# Altium PCB camera.PcbDoc
Units mil, origin at the board's own origin, x right, y up, seen from the top; angles counter-clockwise.
Board outline 1535 x 1315 mil, 2 copper layers (Top Layer, Bottom Layer); 3 components, 20 nets, 60 pads, 0 vias.
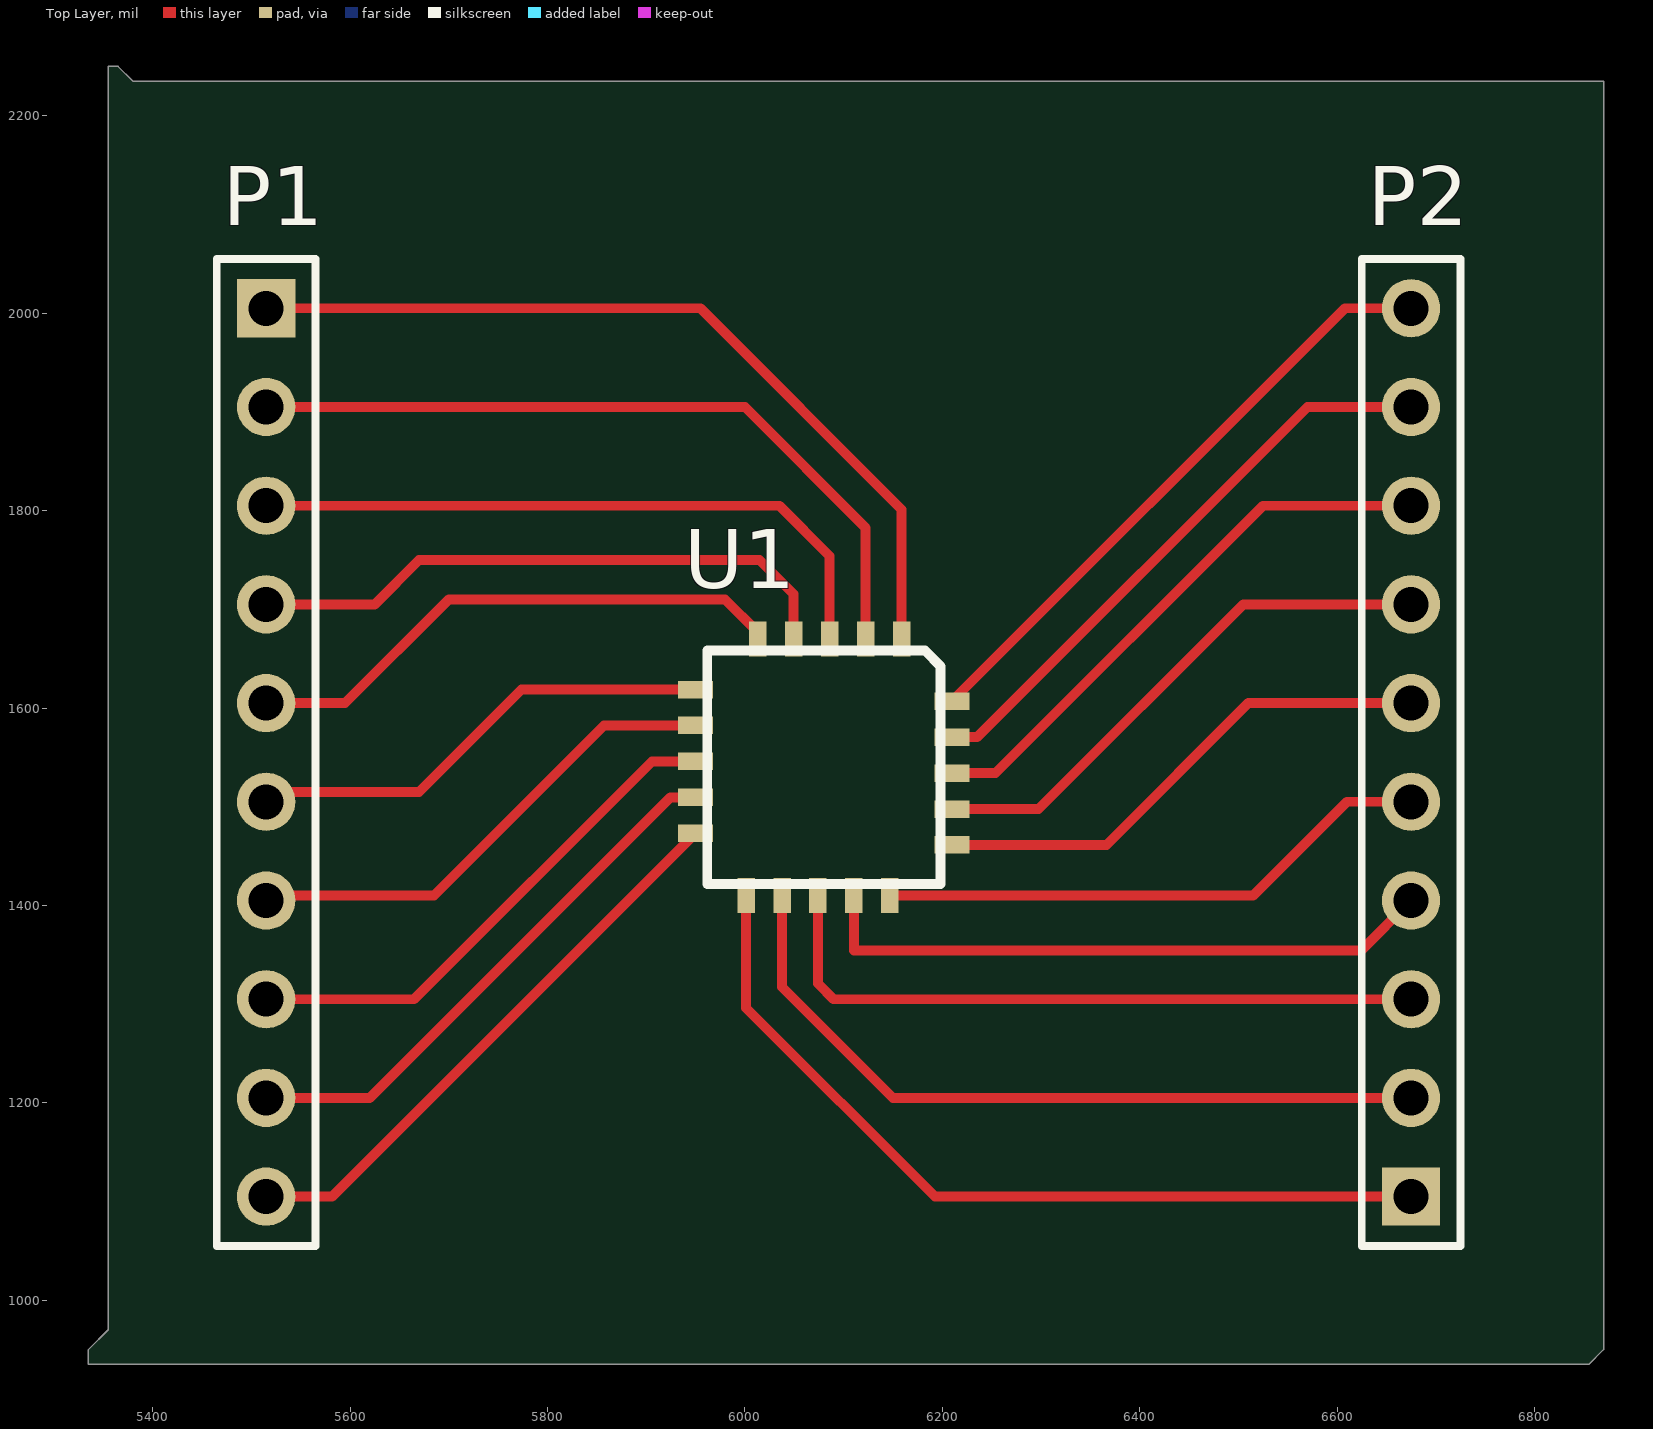
[diagram p0: Top Layer view]
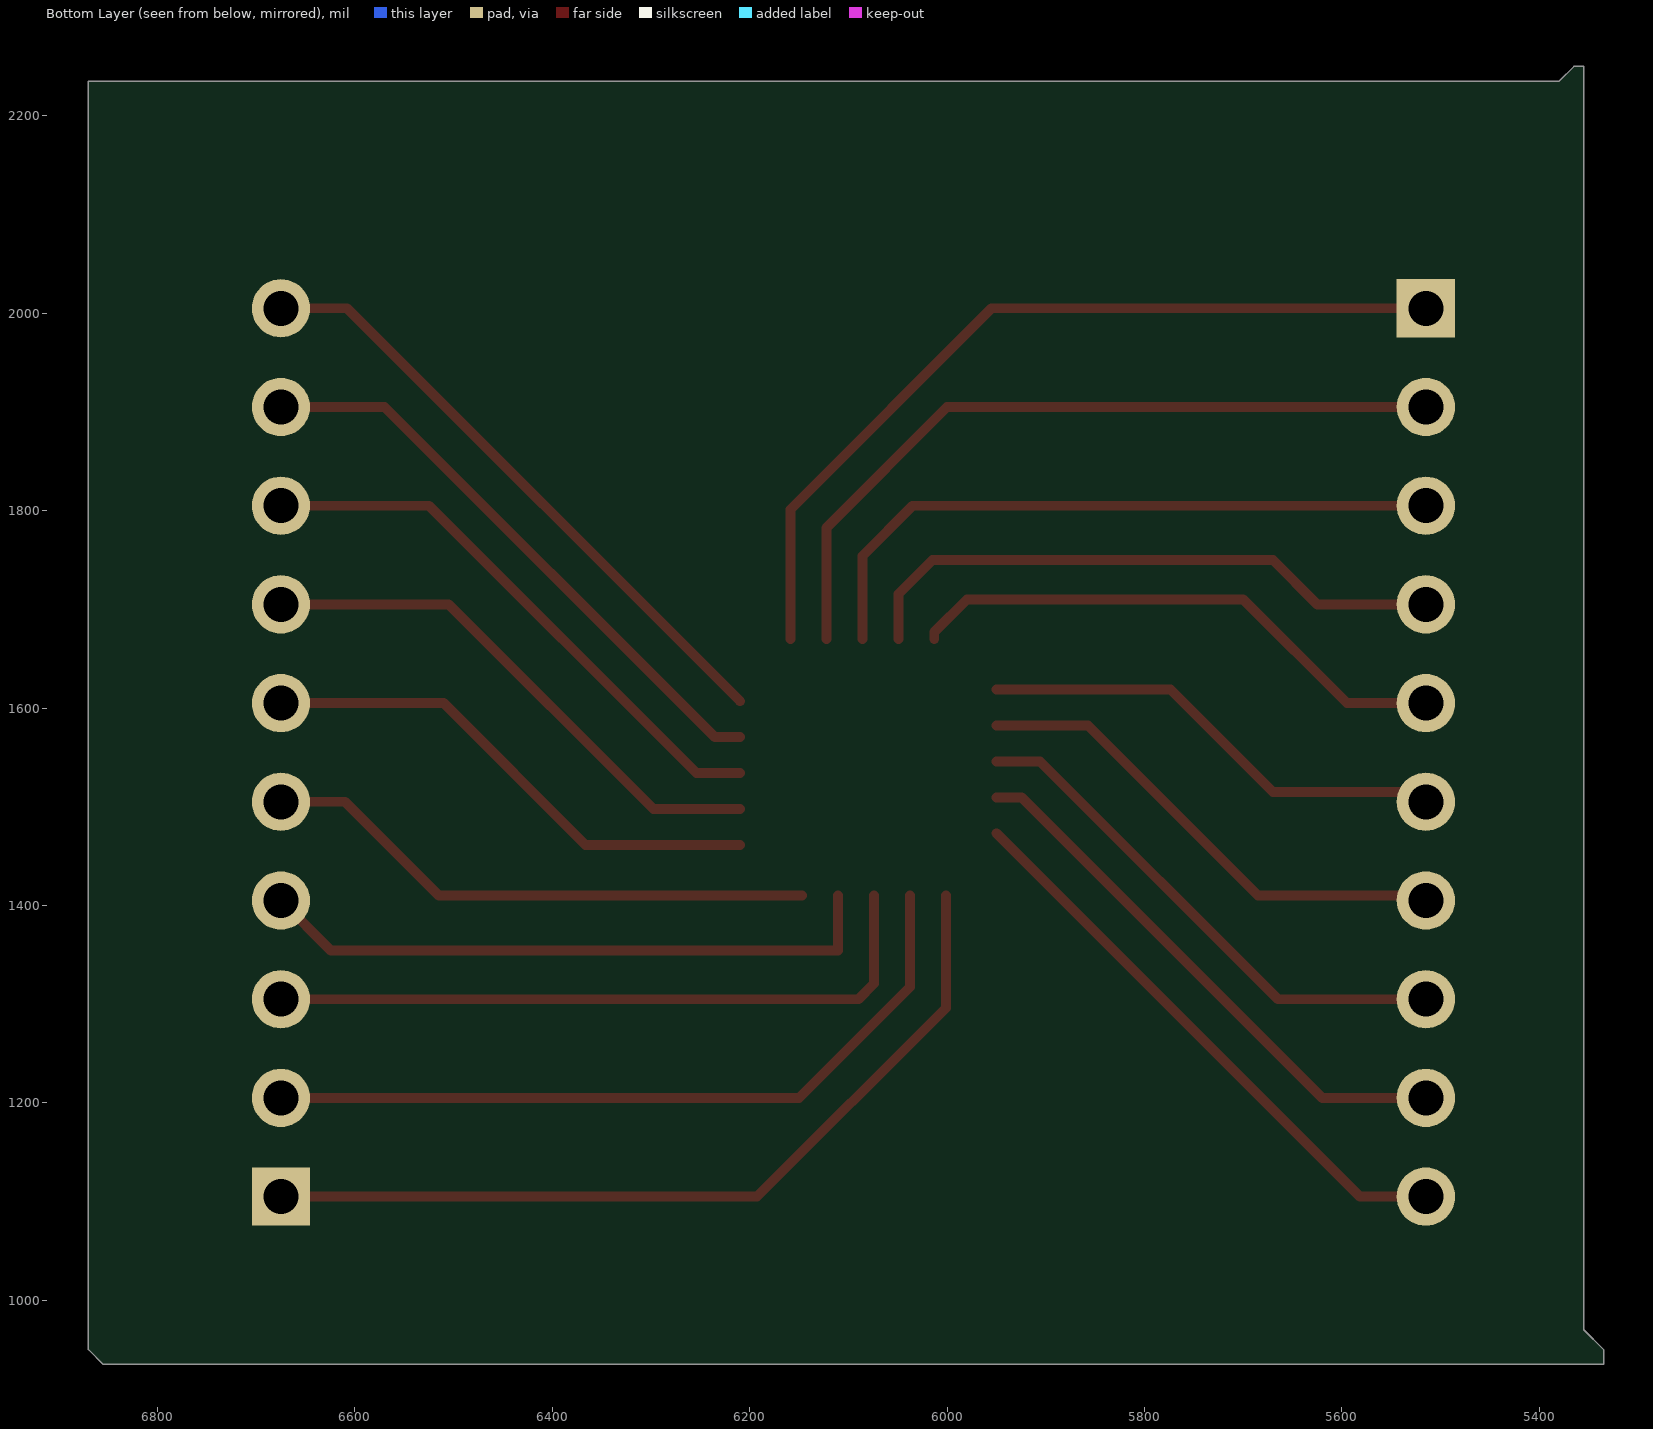
[diagram p1: Bottom Layer view, seen from below]

## Layer stack, top to bottom
Top Layer: signal copper 1.4
Dielectric: dielectric 12.6, FR-4, Dk 4.8
Bottom Layer: signal copper 1.4

## Board outline
5365,2250 5380,2235 6870,2235 6870,950 6855,935 5335,935 5335,950 5355,970 5355,2250

## Design rules (kind name [scope] priority, off if disabled: settings)
Clearance [All] p1: gap=10
PolygonConnect [All] p1: connectstyle=Relief reliefconductorwidth=10 reliefentries=4 polygonreliefangle="90 Angle"
RoomDefinition camera [InComponentClass('camera')] p1: confinementstyle=ConfineIn formatcopy=TRUE lockcomponents=FALSE outline 5840,1300 6160,1300 6160,1720 5840,1720
RoutingVias [All] p1: holewidth=28 width=50 viastyle="Through Hole" minholewidth=28 minwidth=50 maxholewidth=28 maxwidth=50
SilkscreenOverComponentPads [All] p1: minsilkscreentomaskgap=10
SolderMaskExpansion [All] p1: expansion=4
Width [All] p1: maxlimit=10 minlimit=10 preferedwidth=10
27 further rules are at their usual default settings.

## Components (designator, comment, footprint, x,y, rotation, side; value= is the part's Value field where it differs from the comment)
P1 "Header 10" HDR1X10 5515,2005 r270 top
P2 "Header 10" HDR1X10 6675,1105 r90 top
U1 "TCM8230MD_1" TCM8230MD 6080,1540 r0 top

## Footprints (in the part's own frame and the unit in brackets; to place one, negate y for a bottom-side part, rotate by r counter-clockwise, add the part's x,y. Pads: shape width x height; smd on the part's side, far side on the other; paste and mask are expansions set on the pad)
HDR1X10 [mm] "Connector; Header; 10 Position"
  rect 1.5x1.5 hole 0.9: 1(0,0)
  round 1.5 hole 0.9: 2(2.54,0) 3(5.08,0) 4(7.62,0) 5(10.16,0) 6(12.7,0) 7(15.24,0) 8(17.78,0) 9(20.32,0) 10(22.86,0)
  silkscreen extent -1.27,-1.27 24.13,1.27
TCM8230MD [mm] "VGA CAMERA MODULE 640x480"
  rect 0.45x0.6 on Top Overlay: 0(-2.275,-1.4) 0(-1.625,-1.4) 0(-0.975,-1.4) 0(-0.325,-1.4) 0(-0.325,1.4) 0(0.325,-1.4) 0(0.325,1.4) 0(0.975,1.4) 0(1.625,1.4) 0(2.275,1.4)
  rect 0.6x0.45 on Top Overlay: 0(-1.4,-0.325) 0(-1.4,0.325) 0(-1.4,0.975) 0(-1.4,1.625) 0(-1.4,2.275) 0(1.4,-2.275) 0(1.4,-1.625) 0(1.4,-0.975) 0(1.4,-0.325) 0(1.4,0.325)
  rect 0.45x0.9 smd: 1(2,3.3) 2(1.075,3.3) 3(0.15,3.3) 4(-0.775,3.3) 5(-1.7,3.3) 11(-2,-3.3) 12(-1.075,-3.3) 13(-0.15,-3.3) 14(0.775,-3.3) 15(1.7,-3.3)
  rect 0.9x0.45 smd: 6(-3.3,2) 7(-3.3,1.075) 8(-3.3,0.15) 9(-3.3,-0.775) 10(-3.3,-1.7) 16(3.3,-2) 17(3.3,-1.075) 18(3.3,-0.15) 19(3.3,0.775) 20(3.3,1.7)
  silkscreen extent -3,-3 3,3

## Part data
P1 P2: "Header, 10-Pin"
U1: "VGA CAMERA MODULE 640x480"

## Nets (pads, with @x,y where several pads share a name; then routed paths per layer and width w, separated by ;. In a path a pad name is that pad's centre, name@x,y a point inside that pad or via, vN(x,y) a via of type N, cw(c..) or ccw(c..) an arc to the next point about the centre after c; other vN are vias at no path point)
NetP1_1: P1.1 U1.1 | length 859.5
  Top Layer w10: P1.1 5955,2005 6158.74,1801.26 U1.1
NetP1_2: P1.2 U1.2 | length 770.7
  Top Layer w10: P1.2 6000,1905 6122.32,1782.68 U1.2
NetP1_3: P1.3 U1.3 | length 676.2
  Top Layer w10: P1.3 6035,1805 6085.91,1754.09 U1.3
NetP1_4: P1.4 U1.4 | length 613
  Top Layer w10: P1.4 5625,1705 5670,1750 6015,1750 6049.49,1715.51 U1.4
NetP1_5: P1.5 U1.5 | length 562.3
  Top Layer w10: P1.5 5595,1605 5700,1710 5980,1710 6013.07,1676.93 U1.5
NetP1_6: P1.6 U1.6 | length 468
  Top Layer w10: P1.6@5525,1515 5670,1515 5773.74,1618.74 U1.6
NetP1_7: P1.7 U1.7 | length 501.5
  Top Layer w10: P1.7@5520,1410 5685,1410 5857.32,1582.32 U1.7
NetP1_8: P1.8 U1.8 | length 534.9
  Top Layer w10: P1.8 5665,1305 5905.91,1545.91 U1.8
NetP1_9: P1.9 U1.9 | length 561.2
  Top Layer w10: P1.9 5620,1205 5924.49,1509.49 U1.9
NetP1_10: P1.10 U1.10 | length 587.5
  Top Layer w10: P1.10 5582.01,1105 U1.10
NetP2_1: P2.1 U1.11 | length 866.8
  Top Layer w10: U1.11 6001.26,1296.26 6192.52,1105 P2.1
NetP2_2: P2.2 U1.12 | length 776.6
  Top Layer w10: U1.12 6037.68,1317.32 6150,1205 P2.2
NetP2_3: P2.3 U1.13 | length 696.7
  Top Layer w10: U1.13 6074.09,1320.91 6090,1305 P2.3
NetP2_4: P2.4 U1.14 | length 641
  Top Layer w10: U1.14 6110.51,1354.49 6624.49,1354.49 P2.4
NetP2_5: P2.5 U1.15 | length 567.4
  Top Layer w10: U1.15 6515.08,1410.08 6610,1505 P2.5
NetP2_6: P2.6 U1.16 | length 524.6
  Top Layer w10: U1.16 6366.26,1461.26 6510,1605 P2.6
NetP2_7: P2.7 U1.17 | length 551
  Top Layer w10: U1.17 6297.68,1497.68 6505,1705 P2.7
NetP2_8: P2.8 U1.18 | length 577.3
  Top Layer w10: U1.18 6254.09,1534.09 6525,1805 P2.8
NetP2_9: P2.9 U1.19 | length 603.6
  Top Layer w10: U1.19 6235.51,1570.51 6570,1905 P2.9
NetP2_10: P2.10 U1.20 | length 630
  Top Layer w10: U1.20 6607.99,2005 P2.10
pads on no net: U1.0